# Altium PCB CW308T_ESP32_simple.PcbDoc
Units mil, origin at the board's own origin, x right, y up, seen from the top; angles counter-clockwise.
Board outline 2055 x 2540 mil, 2 copper layers (Component Side, Bottom Layer), stack 12.8 mil thick; 39 components, 35 nets, 219 pads, 256 vias.
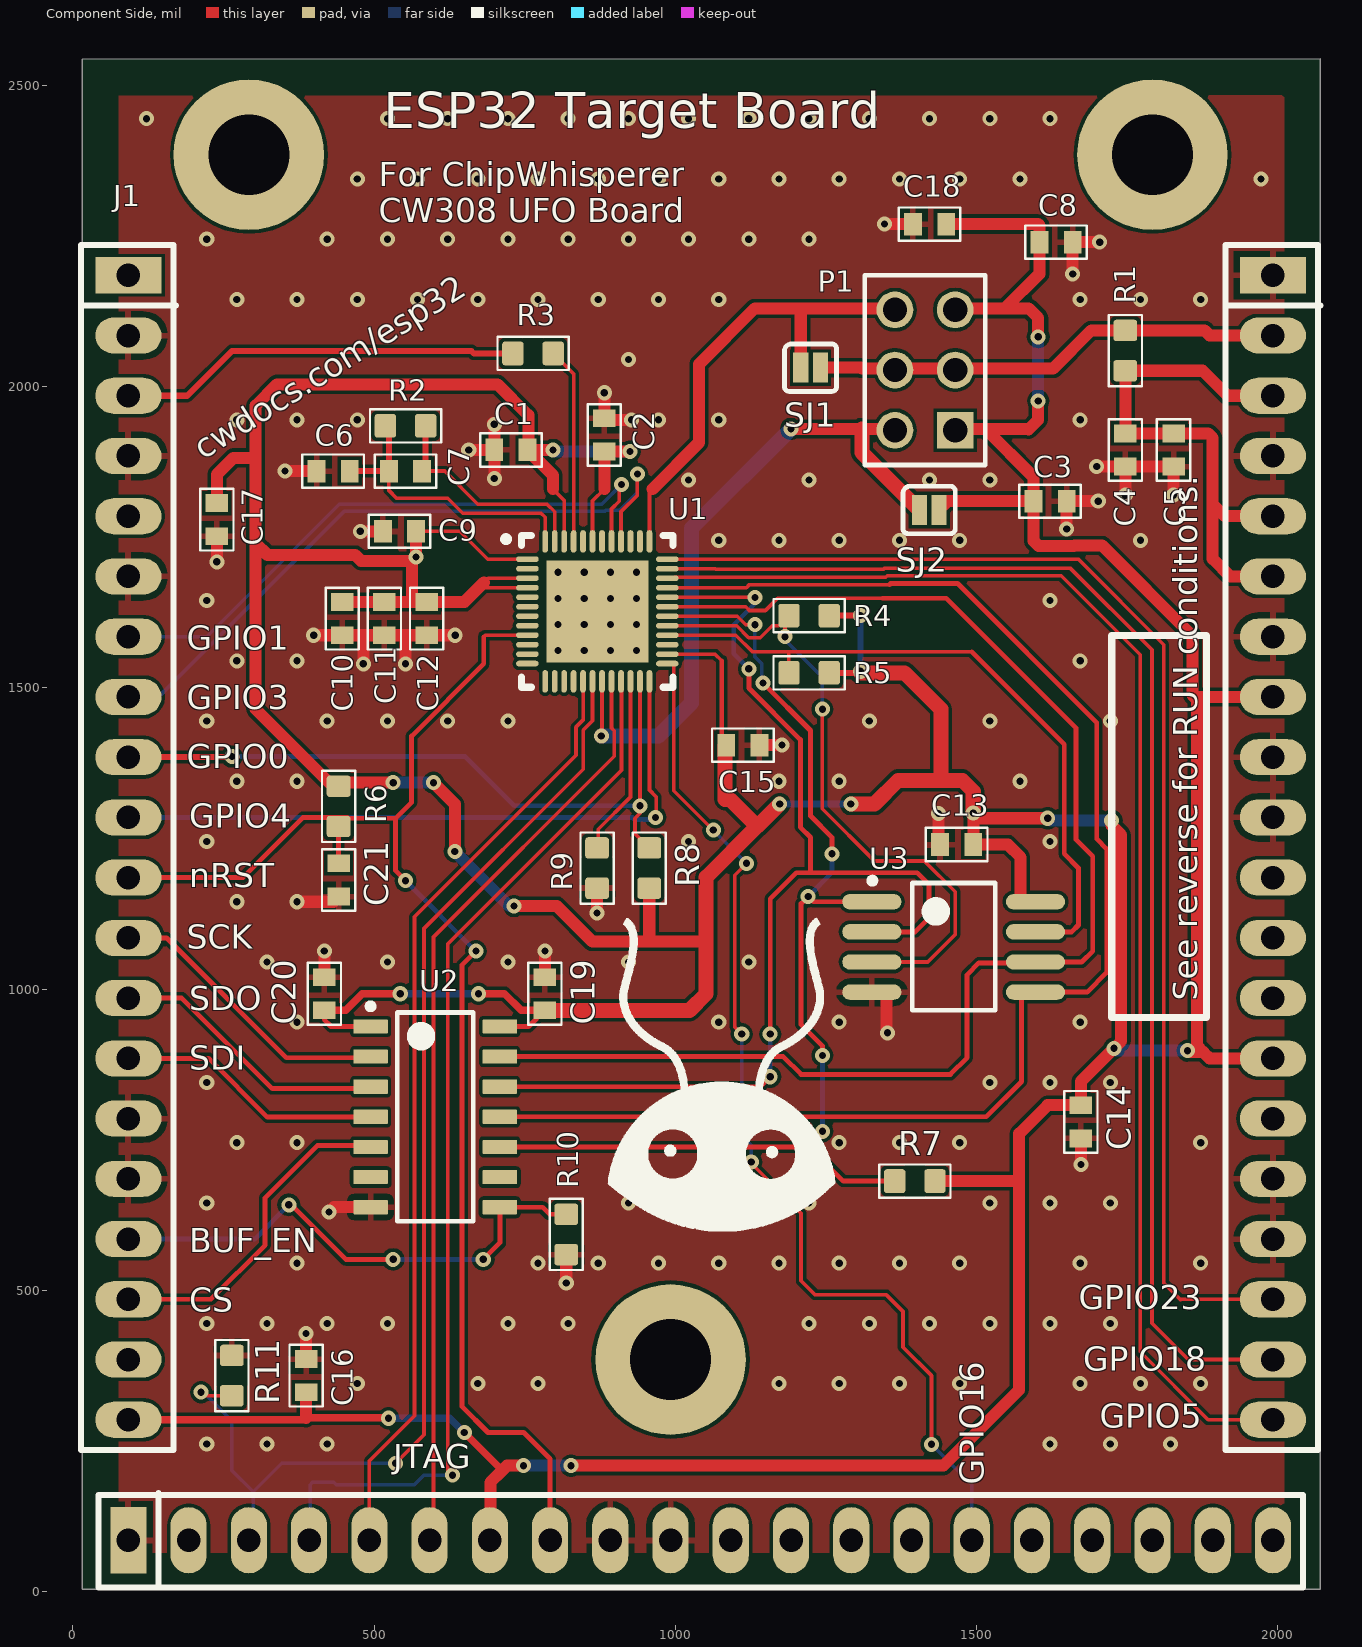
[diagram p0: Component Side view]
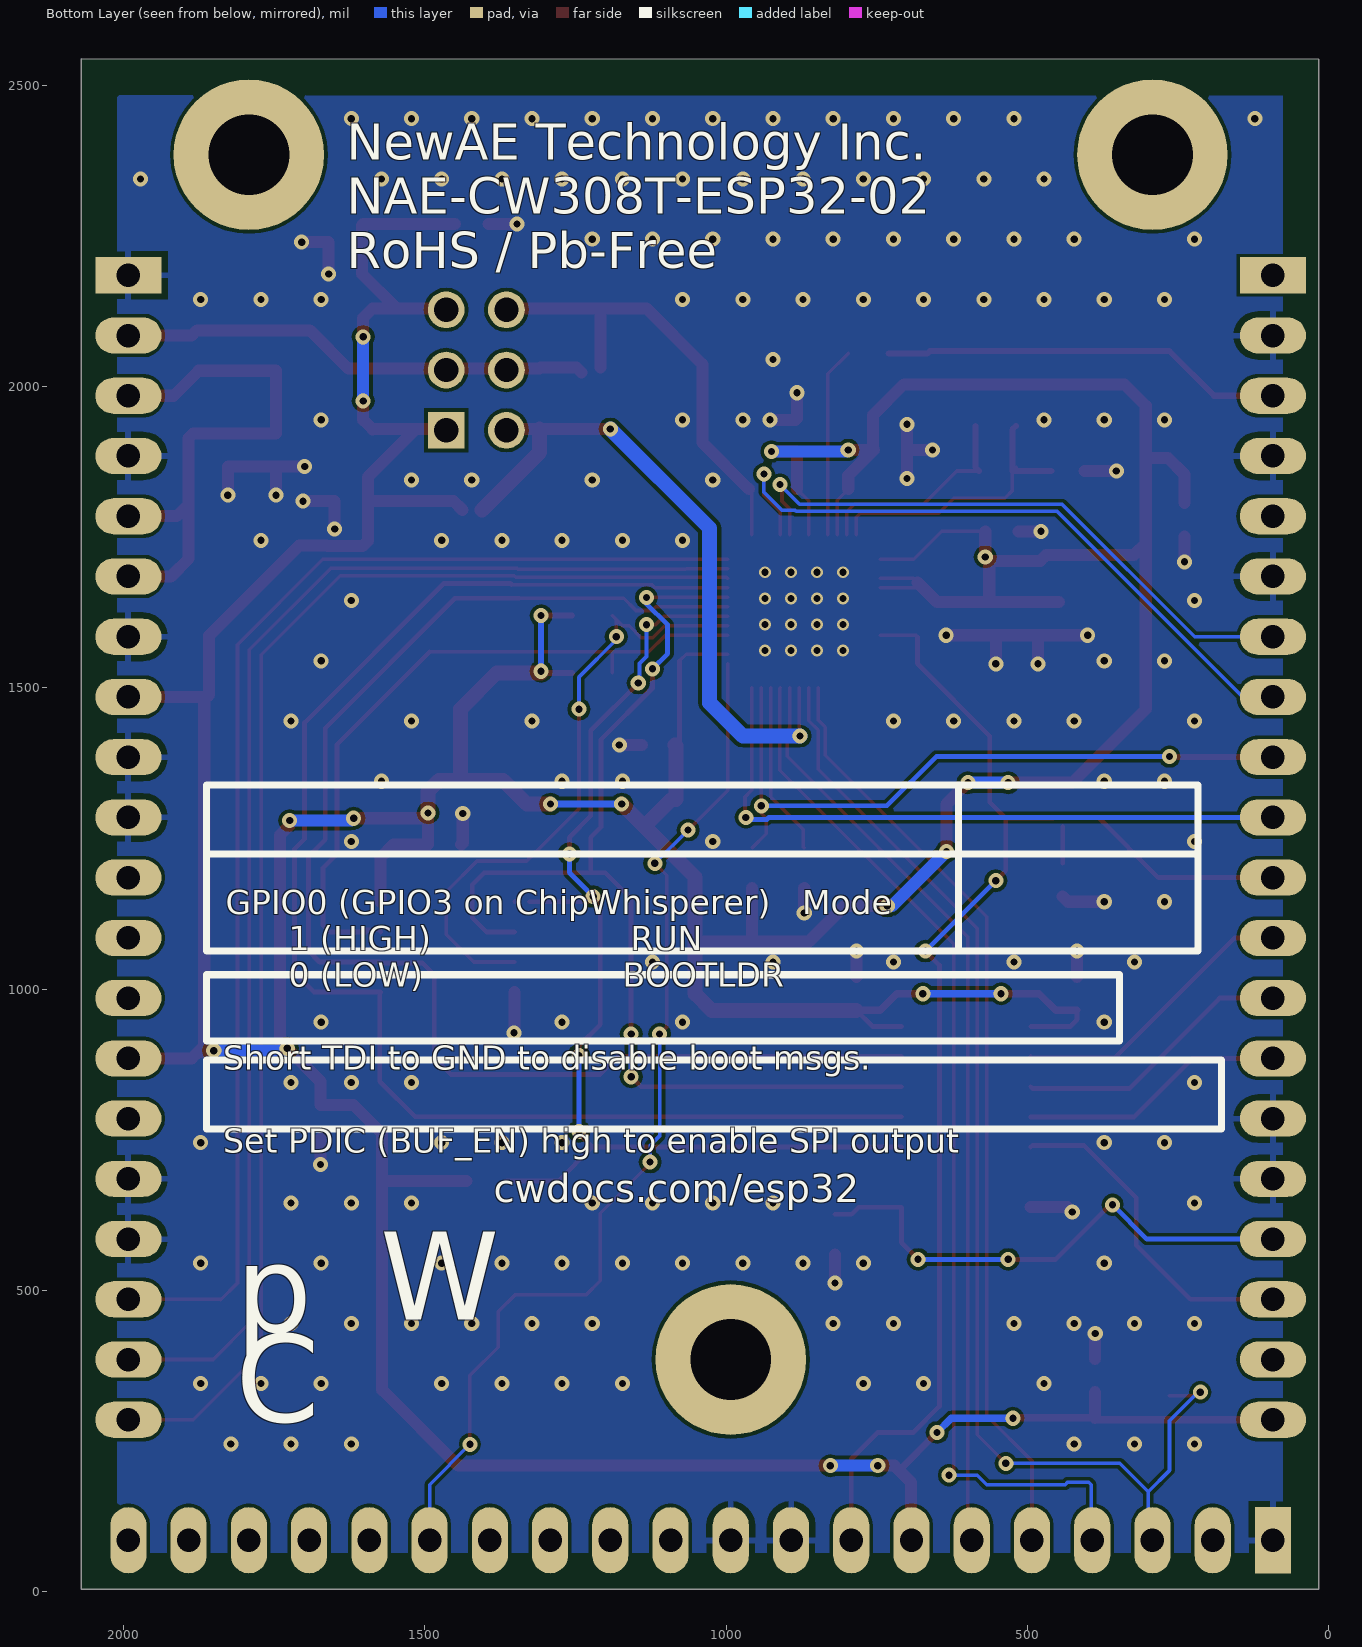
[diagram p1: Bottom Layer view, seen from below]

## Layer stack, top to bottom
Top Solder: solder mask 0.4, Solder Resist, Dk 3.5
Component Side: signal copper 1.4
Dielectric 1: core 10, FR-4, Dk 4.2
Bottom Layer: signal copper 1.4
Solder Side: solder mask 0.4, Solder Resist, Dk 3.5

## Board outline
15.75,3.94 15.75,2543.31 2070.75,2543.94 2070.75,3.94

## Design rules (kind name [scope] priority, off if disabled: settings)
BoardOutlineClearance BoardOutlinePoly [IsPolygon] p1: gap=60 ignorepadtopadclearanceinfootprint=FALSE
BoardOutlineClearance [All] p2: gap=30 ignorepadtopadclearanceinfootprint=FALSE except(0: Arc-SplitContinuation Track-SplitContinuation SMDPad-SplitContinuation THPad-SplitContinuation Via-SplitContinuation Fill-SplitContinuation Poly-SplitContinuation Region-SplitContinuation Text-SplitContinuation)
Clearance [All] p1: gap=6 ignorepadtopadclearanceinfootprint=FALSE except(0: Arc-Hole Track-Hole SMDPad-Hole THPad-Hole Via-Hole Fill-Hole Poly-Hole Region-Hole Text-Hole)
HoleSize [All] p1: absolutevalues=TRUE maxlimit=200 minlimit=1 maxpercent=80.000 minpercent=20.000
MinimumSolderMaskSliver [All] p1: minsoldermaskwidth=5
PlaneConnect PlaneConnect_viaDirect [IsVia] p1: planeconnectstyle=Direct reliefexpansion=20 reliefentries=4 reliefconductorwidth=10 reliefairgap=10
PlaneConnect [All] p2: planeconnectstyle=Relief reliefexpansion=20 reliefentries=4 reliefconductorwidth=10 reliefairgap=10
PolygonConnect PolygonConnect_viaDirect [All vs isVia] p1: connectstyle=Direct reliefconductorwidth=10 reliefentries=4 polygonreliefangle="90 Angle" airgapwidth=10
PolygonConnect [All] p2: connectstyle=Relief reliefconductorwidth=10 reliefentries=4 polygonreliefangle="90 Angle" airgapwidth=10
RoutingVias [All] p1: holewidth=28 width=150 viastyle="Through Hole" minholewidth=12 minwidth=24 maxholewidth=50 maxwidth=50
SilkToSilkClearance [All] p1: silktosilkclearance=5
SilkToSolderMaskClearance [IsPad] p1: minsilkscreentomaskgap=5 clearancetoexposedcopper=TRUE
SolderMaskExpansion [All] p1: expansion=4
Width [All] p1: maxlimit=100 minlimit=6 preferedwidth=8 minimp=50.000000 maximp=50.000000 favimp=50.000000
25 further rules are at their usual default settings.

## Classes and differential pairs
component class ESP32_cw: J1

## Components (designator, comment, footprint, x,y, rotation, side; value= is the part's Value field where it differs from the comment)
C1 "100n" CAPC0603_M 727.05,1894.88 r180 top
C2 "100n" CAPC0603_M 882.05,1919.88 r90 top
C3 "100n" CAPC0603_M 1622.05,1809.88 r180 top
C4 "100n" CAPC0603_M 1747.05,1894.88 r270 top
C5 "2u2" CAPC0603_M 1827.05,1894.88 r270 top
C6 "10n" CAPC0603_M 432.05,1859.88 r0 top
C7 "3n0" CAPC0603_M 552.05,1859.88 r0 top
C8 "100n" CAPC0603_M 1632.05,2239.88 r0 top
C9 "100n" CAPC0603_M 542.05,1759.88 r180 top
C10 "2u2" CAPC0603_M 447.05,1614.88 r270 top
C11 "2u2" CAPC0603_M 517.05,1614.88 r270 top
C12 "100n" CAPC0603_M 587.05,1614.88 r270 top
C13 "100n" CAPC0603_M 1467.05,1239.88 r180 top
C14 "100n" CAPC0603_M 1673.23,779.53 r270 top
C15 "100n" CAPC0603_M 1112.05,1404.88 r0 top
C16 "100n" CAPC0603_M 387.05,358.15 r90 top
C17 "100n" CAPC0603_M 238.82,1779.13 r270 top
C18 "100n" CAPC0603_M 1422.05,2269.88 r180 top
C19 "100n" CAPC0603_M 783.46,992.13 r270 top
C20 "100n" CAPC0603_M 417.32,992.13 r90 top
C21 "100n" CAPC0603_M 440.94,1181.1 r270 top
J1 "CW308_TARGETCON" CW308_TBOARD_CONN 92.05,2184.88 r0 top locked
P1 "TSW-103-08-G-D" SMTC-TSW-103-08-X-D 1464.57,1927.56 r90 top
R1 "10R" RESC1608X55N 1747.05,2059.88 r270 top
R2 "20k" RESC1608X55N 552.05,1934.88 r0 top
R3 "51R" RESC1608X55N 763.78,2055.12 r0 top
R4 "10k" RESC1608X55N 1222.05,1619.88 r180 top
R5 "10k" RESC1608X55N 1222.05,1524.88 r180 top
R6 "10k" RESC1608X55N 440.94,1303.15 r270 top
R7 "10k" RESC1608X55N 1397.64,681.1 r180 top
R8 "10k" RESC1608X55N 956.69,1200.79 r90 top
R9 "10k" RESC1608X55N 870.08,1200.79 r270 top
R10 "100k" RESC1608X55N 818.9,592.52 r90 top
R11 "10k" RESC1608X55N 263.78,358.27 r90 top
SJ1 "NC" SJ_2S_NC 1224.41,2031.5 r0 top
SJ2 "NC" SJ_2S_NC 1421.26,1795.28 r0 top
U1 "ESP32" QFN48_6x6_0.4mm 870.43,1626.85 r0 top
U2 "TXB0104" "SOIC14 (R-PDSO-G14)" 601.38,787.8 r0 top
U3 "IS25WP032D-JBLE" SOIC8_WIDE_NARROW 1462.05,1069.88 r0 top

## Footprints (in the part's own frame and the unit in brackets; to place one, negate y for a bottom-side part, rotate by r counter-clockwise, add the part's x,y. Pads: shape width x height; smd on the part's side, far side on the other; paste and mask are expansions set on the pad)
CAPC0603_M [mm]
  rect 0.75x0.95 smd: 1(-0.7,0) 2(0.7,0)
  silkscreen extent -1.3,-0.7 1.3,0.7, body extent -0.85,-0.45 0.85,0.45, height 0.9
CW308_TBOARD_CONN [mil]
  rect 110x60 hole 39: A1(0,0) C1(1900,0)
  oval 110x60 hole 39: A2(0,-100) A3(0,-200) A4(0,-300) A5(0,-400) A6(0,-500) A7(0,-600) A8(0,-700) A9(0,-800) A10(0,-900) A11(0,-1000) A12(0,-1100) A13(0,-1200) A14(0,-1300) A15(0,-1400) A16(0,-1500) A17(0,-1600) A18(0,-1700) A19(0,-1800) A20(0,-1900) C2(1900,-100) C3(1900,-200) C4(1900,-300) C5(1900,-400) C6(1900,-500) C7(1900,-600) C8(1900,-700) C9(1900,-800) C10(1900,-900) C11(1900,-1000) C12(1900,-1100) C13(1900,-1200) C14(1900,-1300) C15(1900,-1400) C16(1900,-1500) C17(1900,-1600) C18(1900,-1700) C19(1900,-1800) C20(1900,-1900)
  rect 60x110 hole 39: B1(0,-2100)
  oval 60x110 hole 39: B2(100,-2100) B3(200,-2100) B4(300,-2100) B5(400,-2100) B6(500,-2100) B7(600,-2100) B8(700,-2100) B9(800,-2100) B10(900,-2100) B11(1000,-2100) B12(1100,-2100) B13(1200,-2100) B14(1300,-2100) B15(1400,-2100) B16(1500,-2100) B17(1600,-2100) B18(1700,-2100) B19(1800,-2100) B20(1900,-2100)
  round 250 hole 134: MH1(200,200) MH2(900,-1800) MH2(1700,200)
  silkscreen extent -79,-2179 1979,50, body extent -50,-2149 1950,50, height 48
QFN48_6x6_0.4mm [mm] "QFN, 48-Leads, Body 6.00x6.00mm, Pitch 0.40mm, Thermal Pad 4.30x4.30mm, IPC Low Density"
  oval 0.95x0.24 smd paste-0.04: 1(-2.95,2.2) 2(-2.95,1.8) 3(-2.95,1.4) 4(-2.95,1) 5(-2.95,0.6) 6(-2.95,0.2) 7(-2.95,-0.2) 8(-2.95,-0.6) 9(-2.95,-1) 10(-2.95,-1.4) 11(-2.95,-1.8) 12(-2.95,-2.2) 25(2.95,-2.2) 26(2.95,-1.8) 27(2.95,-1.4) 28(2.95,-1) 29(2.95,-0.6) 30(2.95,-0.2) 31(2.95,0.2) 32(2.95,0.6) 33(2.95,1) 34(2.95,1.4) 35(2.95,1.8) 36(2.95,2.2)
  oval 0.24x0.95 smd paste-0.04: 13(-2.2,-2.95) 14(-1.8,-2.95) 15(-1.4,-2.95) 16(-1,-2.95) 17(-0.6,-2.95) 18(-0.2,-2.95) 19(0.2,-2.95) 20(0.6,-2.95) 21(1,-2.95) 22(1.4,-2.95) 23(1.8,-2.95) 24(2.2,-2.95) 37(2.2,2.95) 38(1.8,2.95) 39(1.4,2.95) 40(1,2.95) 41(0.6,2.95) 42(0.2,2.95) 43(-0.2,2.95) 44(-0.6,2.95) 45(-1,2.95) 46(-1.4,2.95) 47(-1.8,2.95) 48(-2.2,2.95)
  rect 4.3x4.3 smd paste-10: 49(0,0)
  silkscreen extent -3.97,-3.2 3.2,3.2, body extent -3.02,-3.02 3.02,3.02, height 0.9
RESC1608X55N [mm] "Chip Resistor, Body 1.6x0.8mm, EIA 0603, IPC Medium Density"
  round 0.254 on Mech15: 0(0,0)
  rrect25% 0.9x1 smd: 1(-0.85,0) 2(0.85,0)
  Component Side pour cut-out: -0.6,0.5 -0.4,0.7 0.4,0.7 0.6,0.5 0.6,-0.5 0.4,-0.7 -0.4,-0.7 -0.6,-0.5
  silkscreen extent -1.5,-0.7 1.5,0.7, body extent -0.87,-0.47 0.88,0.48, height 0.54
SJ_2S_NC [mil] "Solder Jumper, closed with solder paste"
  rect 25x50 smd: 1(-16.22,0) 2(16.22,0)
  silkscreen extent -43,-39 43,39
SMTC-TSW-103-08-X-D [mm] ".025 SQ Post Terminal Strip Assembly, 2x3 Pins, Vertical, 2.54mm Pitch, Male"
  rect 1.55x1.55 hole 1.02: 1(0,0)
  round 1.55 hole 1.02: 2(0,2.54) 3(2.54,0) 4(2.54,2.54) 5(5.08,0) 6(5.08,2.54)
  silkscreen extent -1.46,-1.27 6.54,3.81, body extent -1.27,-1.27 6.35,3.81, height 8.38
SOIC8_WIDE_NARROW [mm] "SOIC, 8-Leads, Body 5.28x5.28mm, Pitch 1.27mm, NOT IPC - Fits Narrow+Wide"
  oval 2.5x0.65 smd: 1(-3.45,1.905) 2(-3.45,0.635) 3(-3.45,-0.635) 4(-3.45,-1.905) 5(3.45,-1.905) 6(3.45,-0.635) 7(3.45,0.635) 8(3.45,1.905)
  silkscreen extent -3.55,-2.67 1.75,2.92, body extent -3.95,-2.7 3.95,2.7, height 2.16
"SOIC14 (R-PDSO-G14)" [mm] "SOIC, 14-Leads, Body 8.65x3.90mm, Pitch 1.27mm, IPC Medium Density"
  rrect10% 1.45x0.6 smd: 1(-2.725,3.81) 2(-2.725,2.54) 3(-2.725,1.27) 4(-2.725,0) 5(-2.725,-1.27) 6(-2.725,-2.54) 7(-2.725,-3.81) 8(2.725,-3.81) 9(2.725,-2.54) 10(2.725,-1.27) 11(2.725,0) 12(2.725,1.27) 13(2.725,2.54) 14(2.725,3.81)
  silkscreen extent -2.85,-4.4 1.6,4.78, body extent -3,-4.4 3,4.4, height 1.75

## Part data
C1 C2 C3 C4 C8 C9 C12 C13 C14 C15 C16 C17 C18 C19 C20 C21: library part CCHIP-100n-0603, "100n, 0603", Case-EIA=0603, Case-Metric=1608, Manufacture 1=Kemet, Manufacture Part Number 1=C0603C104K5RACTU, Rated Voltage=50V, Supplier Part Number 1=399-5089-2-ND, Component Group=Capacitor, Component Type=Standard, Mounting Technology=SMT, Part Number=CCHIP-100n-0603, Pin Count=2, Supplier 1=Digi-Key
C5 C10 C11: library part CCHIP-2u2-0603, "2u2, 0603", Case-EIA=0603, Case-Metric=1608, Manufacture 1=Samsung, Manufacture Part Number 1=CL10B225KP8NNNC, Supplier Part Number 1=1276-1134-2-ND, Component Group=Capacitor, Component Type=Standard, Mounting Technology=SMT, Part Number=CCHIP-2u2-0603, Pin Count=2, Supplier 1=Digi-Key
C6: library part CCHIP-10n-0603, "10n, 0603", Case-EIA=0603, Case-Metric=1608, Component Group=Capacitor, Component Type=Standard, Mounting Technology=SMT, Part Number=CCHIP-10n-0603, Pin Count=2
C7: library part CCHIP-3n0-0603, "3n0, 0603", Case-EIA=0603, Case-Metric=1608, Component Group=Capacitor, Component Type=Standard, Mounting Technology=SMT, Part Number=CCHIP-3n0-0603, Pin Count=2
J1: library part CW308_TBOARD, "CW308 \"Standard\" Target Board Connector", Component Group=Mechanical, Component Type=Standard, Mounting Technology=Through-hole, Part Number=CW308_TBOARD, Pin Count=60, Pitch=2.54mm
P1: library part CMP-1024-00338-1, Manufacturer=Samtec, Temperature Range="-55 to 125 degC", ComponentLink1Description="Manufacturer URL", ComponentLink1URL=http://www.samtec.com, ComponentLink2Description=Datasheet, ComponentLink2URL=http://www.samtec.com/documents/webfiles/pdf/TSW_TH.PDF, ComponentLink3Description="Package Specification", ComponentLink3URL=http://www.samtec.com/documents/webfiles/cpdf/TSW-XXX-XX-XXX-X-XX-XXX-MKT.pdf, DatasheetVersion=F-214, Mounting Technology=Through-hole, Orientation=Vertical, PackageDescription=".025[0.64] SQ. Post Terminal Strip Assembly", PackageReference=TSW-103-08-X-D, PackageVersion="DM, 8/1988", PartNumber=TSW-103-08-G-D, Pitch="2.54 mm", RoHS=True
R1: library part RCHIP-10R-0603, "10R res, 0603, 1%, 1/10W", Case-EIA=0603, Case-Metric=1608, Manufacture 1=Yageo, Manufacture Part Number 1=RC0603FR-0710RL, Rated Power=0.1W, Rated Voltage=75VDC, Supplier Part Number 1=311-10.0HRCT-ND, Temperature Range="-55C to 155C", Tolerance=1%, Component Group=Resistor, Component Type=Standard, Mounting Technology=SMT, Part Number=RCHIP-10R-0603, Pin Count=2, Supplier 1=Digi-Key
R2: library part RCHIP-20K-0603, "20k res, 0603, 1%, 1/10W", Case-EIA=0603, Case-Metric=1608, Manufacture 1=Yageo, Manufacture Part Number 1=RC0603FR-0720KL, Rated Power=0.1W, Rated Voltage=75VDC, Supplier Part Number 1=311-20.0KHRCT-ND, Temperature Range="-55C to 155C", Tolerance=1%, Component Group=Resistor, Component Type=Standard, Mounting Technology=SMT, Part Number=RCHIP-20K-0603, Pin Count=2, Supplier 1=Digi-Key
R3: library part RCHIP-51R-0603, "51R res, 0603, 1%, 1/10W", Case-EIA=0603, Case-Metric=1608, Manufacture 1=Yageo, Manufacture Part Number 1=RC0603FR-0751RL, Rated Power=0.1W, Rated Voltage=75VDC, Supplier Part Number 1=311-51.0HRCT-ND, Temperature Range="-55C to 155C", Tolerance=1%, Component Group=Resistor, Component Type=Standard, Mounting Technology=SMT, Part Number=RCHIP-51R-0603, Pin Count=2, Supplier 1=Digi-Key
R4 R5 R6 R7 R8 R9 R11: library part RCHIP-10K-0603, "10k res, 0603, 1%, 1/10W", Case-EIA=0603, Case-Metric=1608, Manufacture 1=Yageo, Manufacture Part Number 1=RC0603FR-0710KL, Rated Power=0.1W, Rated Voltage=75VDC, Supplier Part Number 1=311-10.0KHRCT-ND, Temperature Range="-55C to 155C", Tolerance=1%, Component Group=Resistor, Component Type=Standard, Mounting Technology=SMT, Part Number=RCHIP-10K-0603, Pin Count=2, Supplier 1=Digi-Key
R10: library part RCHIP-100K-0603, "100k res, 0603, 1%, 1/10W", Case-EIA=0603, Case-Metric=1608, Manufacture 1=Yageo, Manufacture Part Number 1=RC0603FR-07100KL, Rated Power=0.1W, Rated Voltage=75VDC, Supplier Part Number 1=311-100KHRCT-ND, Temperature Range="-55C to 155C", Tolerance=1%, Component Group=Resistor, Component Type=Standard, Mounting Technology=SMT, Part Number=RCHIP-100K-0603, Pin Count=2, Supplier 1=Digi-Key
SJ1 SJ2: library part SJ_2S, "Solder Jumper, NC", Component Group="PCB Feature", Component Type="Standard (No BOM)", Mounting Technology=COPPER, Part Number=SJ_2S, Pin Count=2
U1: "Dual-Core WiFi/Bluetooth Chip", Component Group="Digital IC", Component Type=Standard, Mounting Technology=SMT, Part Number=ESP32, Pin Count=48
U2: library part TXB0104DR, "IC 4BIT NON-INV TRANSLTR 14-SOIC", Manufacture 1="Texas Instruments", Supplier Part Number 1=296-21928-1-ND, Component Group="Digital IC", Component Type=Standard, Manufacture Part Number 1=TXB0104DR, Mounting Technology=SMT, Part Number=TXB0104DR, Pin Count=14, PP Material Stack=0, PP Rotation=0, RoHS=Yes, Supplier 1=Digi-Key
U3: "32MB QPI/QPI/QSPI 8-PIN SOP 208M", Manufacture 1=ISSI, Supplier Part Number 1=706-1615-ND, Component Group="Digital IC", Component Type=Standard, Manufacture Part Number 1=IS25WP032D-JBLE, Mounting Technology=SMT, Part Number=IS25WP032D-JBLE, Pin Count=8, Pitch=1.27mm, RoHS=Yes, Supplier 1=Digi-Key

## Via types
v1: diameter 25, hole 12, Component Side to Bottom Layer, tented both sides, 240 vias
v2: diameter 19.68, hole 11.81, Component Side to Bottom Layer, 16 vias

## Nets (pads, with @x,y where several pads share a name; then routed paths per layer and width w, separated by ;. In a path a pad name is that pad's centre, name@x,y a point inside that pad or via, vN(x,y) a via of type N, cw(c..) or ccw(c..) an arc to the next point about the centre after c; other vN are vias at no path point)
BUF_CS: J1.A18 U2.5 | length 554.9
  Component Side w8: J1.A18 228.98,484.88 318.9,574.8 318.9,653.54 405.51,740.16 491.73,740.16 U2.5
BUF_SCK: J1.A12 U2.2 | length 485.3
  Component Side w8: J1.A12 155.28,1084.88 354.33,885.83 492.13,885.83 U2.2
BUF_SDI: J1.A14 U2.4 | length 442.6
  Component Side w8: J1.A14 225.35,884.88 322.83,787.4 493.7,787.4 U2.4
BUF_SDO: J1.A13 U2.3 | length 465.6
  Component Side w8: J1.A13 180.47,984.88 330.71,834.65 490.94,834.65 U2.3
CLK: J1.A3 R3.1 | length 670.6
  Component Side w10: J1.A3 189.61,1984.88 263.78,2059.06 661.42,2059.06 665.35,2055.12 R3.1
FLASH_CS: R7.2 U1.30 U2.10 U3.1 | length 1895
  Component Side w6: U1.30@997.4,1618.98 1102.95,1618.98 1117.05,1604.88 v1(1132.05,1604.88)
  Component Side w8: U2.10 1222.05,737.8 ; v1(1145.67,1507.87) 1224.41,1429.13 1224.41,1287.4 1259.84,1251.97 v1(1259.84,1224.41) ; v1(1244.09,763.78) 1244.09,759.84 1222.05,737.8 ; v1(1244.09,889.76) 1244.09,905.51 1208.66,940.94 1208.66,1141.73 v1(1220.47,1153.54) 1229.13,1144.88 U3.1 ; U3.1@1350.04,1145.67 U3.1@1350.83,1144.88 ; R7.2 1278.74,681.1 1222.05,737.8
  Bottom Layer w6: v1(1132.05,1604.88) 1132.05,1551.9 1143.55,1540.4 1143.55,1510 v1(1145.67,1507.87)
  Bottom Layer w8: v1(1220.47,1153.54) 1259.84,1192.91 v1(1259.84,1224.41) ; v1(1244.09,763.78) v1(1244.09,889.76)
FLASH_HD: R5.2 U1.28 U3.7 | length 1170.3
  Component Side w6: U1.28@997.4,1587.48 1100.51,1587.48 1128.11,1559.88 1188.58,1559.88 ; R5.2 1188.58,1559.88 ; 1492.05,1559.88 1188.58,1559.88
  Component Side w8: 1492.05,1559.88 1645.67,1406.26 1645.67,1224.41 1669.29,1200.79 1669.29,1106.3 1657.87,1094.88 U3.7 ; U3.7@1573.27,1094.88 1576.81,1098.43 U3.7@1597.87,1098.43
FLASH_SCK: U1.31 U2.13 U3.6 | length 2311.7
  Component Side w6: U1.31@997.4,1634.72 1116.8,1634.72 1123.14,1628.38 1149.55,1628.38 1169.73,1648.57 1343.36,1648.57
  Component Side w8: U2.13 1179.13,887.8 1208.66,858.27 1456.69,858.27 1484.25,885.83 1484.25,1023.62 1503.94,1043.31 1571.69,1043.31 1573.27,1044.88 1674.8,1044.88 1692.91,1062.99 1692.91,1220.47 1665.35,1248.03 1665.35,1433.07 1449.86,1648.57 1343.36,1648.57
FLASH_SDI: U1.33 U2.11 U3.5 | length 2418.7
  Component Side w6: U1.33@997.4,1666.22 1117.98,1666.22 1123.14,1671.38 1355.55,1671.38
  Component Side w8: U2.11 1516.14,787.8 1574.8,846.46 1574.8,993.35 1573.27,994.88 1683.86,994.88 1716.54,1027.56 1716.54,1232.28 1699.55,1249.27 1699.55,1442.19 1468.5,1673.23 1357.39,1673.23 1355.55,1671.38
FLASH_SDO: U1.32 U2.12 U3.2 | length 1835.1
  Component Side w6: U1.32@997.4,1650.47 1131.46,1650.47 v1(1132.05,1649.88)
  Component Side w8: U2.12 1140.94,837.8 v1(1157.48,854.33) ; v1(1122.05,1531.5) 1122.05,1499.68 1207.59,1414.13 1207.59,1268.78 1224.41,1251.97 1224.41,1192.91 ; v1(1157.48,925.2) 1157.48,1149.61 1200.79,1192.91 1224.41,1192.91 ; U3.2@1350.83,1094.88 1398.03,1094.88 1421.26,1118.11 1421.26,1173.23 1401.57,1192.91 1224.41,1192.91
  Bottom Layer w8: v1(1122.05,1531.5) 1097.05,1556.5 1097.05,1604.88 1132.05,1639.88 v1(1132.05,1649.88) ; v1(1157.48,854.33) v1(1157.48,925.2)
FLASH_WP: R4.2 U1.29 U3.3 | length 1035.4
  Component Side w6: U1.29@997.4,1603.23 1101.73,1603.23 1121.58,1583.38 1140.95,1583.38 1160.8,1603.23 1171.93,1603.23 R4.2@1182.05,1613.35 ; v1(1182.05,1584.88) R4.2@1182.05,1613.35 ; R4.2 R4.2@1182.05,1613.35 ; v1(1244.09,1464.57) 1244.09,1299.21 1330.71,1212.6 1413.39,1212.6 1464.57,1161.42 1464.57,1090.55 1418.9,1044.88 U3.3@1350.83,1044.88
  Bottom Layer w6: v1(1182.05,1584.88) 1182.05,1579.88 1244.09,1517.83 v1(1244.09,1464.57)
GND: C1.2 C2.2 C3.1 C4.2 C5.2 C6.1 C8.2 C9.2 C10.2 C11.2 C12.2 C13.2 C14.2 C15.2 C16.2 C17.2 C18.2 C19.1 C20.2 C21.2 J1.A2 J1.A4 J1.A6 J1.A15 J1.A16 J1.B1 J1.B9 J1.B10 J1.C1 J1.C4 J1.C7 J1.C9 J1.C10 J1.C16 J1.C17 R9.2 R10.1 R11.2 U1.49 U2.7 U3.4 | length 1718.5
  Component Side w20: v1(238.82,1709.13) C17.2 ; v1(352.05,1859.88) C6.1 ; v1(372.05,1144.88) 432.28,1144.88 C21.2 ; C16.2 v1(387.05,428.15) ; v1(399.61,1587.32) C10.2 482.05,1587.32 ; C20.2 v1(417.32,1062.99) ; v1(425.2,629.92) 433.07,637.8 U2.7 ; v1(477.05,1759.88) C9.2 ; v1(482.05,1539.88) 482.05,1587.32 ; v1(552.05,1539.88) 552.05,1587.32 ; v1(634.49,1587.32) C12.2 552.05,1587.32 ; v1(657.05,1894.88) C1.2 ; v1@697.05,1939.88 v1(699.49,1937.44) C1.2 ; v1(699.49,1847.44) C1.2 ; C19.1 v1(783.46,1062.99) ; v1(818.9,511.81) R10.1 ; v1(870.08,1125.98) R9.2 ; v1(882.05,1989.88) C2.2 884.61,1944.88 v1(927.05,1944.88) ; C15.2 v1(1177.05,1404.88) ; v1(1347.05,2269.88) C18.2 ; U3.4@1350.83,994.88 1350.83,926.1 v1(1352.05,927.32) ; v1(1437.01,1291.34) 1437.01,1242.36 C13.2 ; v1(1649.61,1763.78) C3.1 v1(1702.05,1809.88) ; v1(1659.61,2187.17) C8.2 v1(1704.45,2239.88) ; v1(1673.23,708.66) C14.2 ; v1(1699.49,1867.32) C4.2 ; v1(1747.05,1819.88) C4.2 ; v1(1827.05,1819.88) C5.2 C4.2 ; 482.05,1587.32 C11.2 552.05,1587.32
  other v1: 222.05,244.88 322.05,244.88 422.05,244.88 1622.05,244.88 1722.05,244.88 1822.05,244.88 472.05,344.88 672.05,344.88 772.05,344.88 1172.05,344.88 1272.05,344.88 1372.05,344.88 1472.05,344.88 1672.05,344.88 1772.05,344.88 1872.05,344.88 222.05,444.88 322.05,444.88 422.05,444.88 522.05,444.88 722.05,444.88 822.05,444.88 1222.05,444.88 1322.05,444.88 1422.05,444.88 1522.05,444.88 1622.05,444.88 1722.05,444.88 372.05,544.88 772.05,544.88 872.05,544.88 972.05,544.88 1072.05,544.88 1172.05,544.88 1272.05,544.88 1372.05,544.88 1472.05,544.88 1672.05,544.88 1872.05,544.88 222.05,644.88 922.05,644.88 1022.05,644.88 1122.05,644.88 1222.05,644.88 1522.05,644.88 1622.05,644.88 1722.05,644.88 272.05,744.88 372.05,744.88 1272.05,744.88 1372.05,744.88 1472.05,744.88 1872.05,744.88 222.05,844.88 1522.05,844.88 1622.05,844.88 1722.05,844.88 372.05,944.88 1072.05,944.88 1272.05,944.88 1672.05,944.88 322.05,1044.88 522.05,1044.88 722.05,1044.88 922.05,1044.88 1122.05,1044.88 272.05,1144.88 222.05,1244.88 1022.05,1244.88 1622.05,1244.88 272.05,1344.88 372.05,1344.88 1172.05,1344.88 1272.05,1344.88 1572.05,1344.88 222.05,1444.88 422.05,1444.88 522.05,1444.88 622.05,1444.88 722.05,1444.88 1322.05,1444.88 1522.05,1444.88 1722.05,1444.88 272.05,1544.88 372.05,1544.88 1672.05,1544.88 222.05,1644.88 1622.05,1644.88 1072.05,1744.88 1172.05,1744.88 1272.05,1744.88 1372.05,1744.88 1472.05,1744.88 1772.05,1744.88 1022.05,1844.88 1222.05,1844.88 1422.05,1844.88 1522.05,1844.88 272.05,1944.88 372.05,1944.88 472.05,1944.88 972.05,1944.88 1072.05,1944.88 1672.05,1944.88 922.05,2044.88 272.05,2144.88 372.05,2144.88 472.05,2144.88 572.05,2144.88 672.05,2144.88 772.05,2144.88 872.05,2144.88 972.05,2144.88 1072.05,2144.88 1672.05,2144.88 1772.05,2144.88 1872.05,2144.88 222.05,2244.88 422.05,2244.88 522.05,2244.88 622.05,2244.88 722.05,2244.88 822.05,2244.88 922.05,2244.88 1022.05,2244.88 1122.05,2244.88 1222.05,2244.88 472.05,2344.88 572.05,2344.88 672.05,2344.88 772.05,2344.88 872.05,2344.88 972.05,2344.88 1072.05,2344.88 1172.05,2344.88 1272.05,2344.88 1372.05,2344.88 1472.05,2344.88 1572.05,2344.88 1972.05,2344.88 122.05,2444.88 522.05,2444.88 622.05,2444.88 722.05,2444.88 822.05,2444.88 922.05,2444.88 1022.05,2444.88 1122.05,2444.88 1222.05,2444.88 1322.05,2444.88 1422.05,2444.88 1522.05,2444.88 1622.05,2444.88
  other v2: 805.47,1561.89 848.78,1561.89 892.09,1561.89 935.39,1561.89 805.47,1605.2 848.78,1605.2 892.09,1605.2 935.39,1605.2 805.47,1648.5 848.78,1648.5 892.09,1648.5 935.39,1648.5 805.47,1691.81 848.78,1691.81 892.09,1691.81 935.39,1691.81
GPIO3: J1.A9 R8.2 U1.23 | length 1170.2
  Component Side w6: U1.23@941.3,1499.88 v1(941.3,1304.13) 941.3,1291.69 933.07,1283.46 933.07,1257.87 R8.2
  Component Side w10: J1.A9 v1@272.05,1384.88
  Bottom Layer w8: v1(263.78,1385.83) 651.1,1385.83 732.8,1304.13 v1(941.3,1304.13)
GPIO16: J1.B15 U1.25 | length 1745.7
  Component Side w6: U1.25@997.4,1540.24 997.4,1329.37 v1(1062.99,1263.78) ; v1(1110.24,925.2) 1098.43,937.01 1098.43,1188.98 v1(1118.11,1208.66) ; v1(1125.98,712.6) 1125.98,710.54 1208.66,627.86 1208.66,515.75 1232.28,492.13 1350.39,492.13 1377.95,464.57 1377.95,405.51 1425.2,358.27 v1(1425.2,244.09)
  Bottom Layer w6: v1(1062.99,1263.78) v1(1118.11,1208.66) ; v1(1110.24,925.2) 1110.24,755.91 1125.98,740.16 v1(1125.98,712.6) ; v1(1425.2,244.09) 1492.05,177.24 J1.B15
LED1: J1.C18 U1.36 | length 2125
  Component Side w6: U1.36@997.4,1713.46 1669.29,1713.46 1811.02,1571.73 1811.02,511.81 1838.58,484.25 1839.21,484.88 J1.C18
LED2: J1.C19 U1.35 | length 2194.6
  Component Side w6: U1.35@997.4,1697.72 1066.06,1697.72 1066.93,1696.85 1345.66,1696.85 1347.04,1698.23 1656.1,1698.23 1791.34,1562.99 1791.34,444.88 1851.34,384.88 J1.C19
LED3: J1.C20 U1.34 | length 2254.9
  Component Side w6: U1.34@997.4,1681.97 998.81,1683.38 1349.16,1683.38 1352.01,1686.23 1640.54,1686.23 1771.65,1555.12 1771.65,397.64 1884.41,284.88 J1.C20
NetC6_2: C6.2 C7.1 R2.1 U1.48 | length 490.1
  Component Side w6: C7.1@518.58,1865.79 C7.1 524.49,1827.44 537.05,1814.88 622.05,1814.88 647.05,1789.88 777.05,1789.88 783.82,1783.11 U1.48@783.82,1753.82
  Component Side w10: C6.2 C7.1 524.49,1928.98 R2.1
NetC7_2: C7.2 R2.2 U1.47 | length 363.9
  Component Side w6: C7.2 617.05,1859.88 672.05,1804.88 787.05,1804.88 799.57,1792.36 U1.47@799.57,1753.82
  Component Side w10: C7.2 585.51,1865.79 R2.2
NetR3_2: R3.2 U1.45 | length 315.3
  Component Side w6: R3.2 831.06,2021.3 U1.45@831.06,1753.82
NetR9_1: R9.1 U1.22 | length 288.6
  Component Side w6: R9.1 872.05,1236.22 872.05,1265.29 925.55,1318.79 U1.22@925.55,1499.88
nRST: C21.1 J1.A11 J1.B8 R6.2 U1.9 | length 2330.1
  Component Side w6: 682.05,1584.88 684.65,1587.48 U1.9@743.46,1587.48
  Component Side w8: J1.A11 282.05,1184.88 382.05,1284.88 455.51,1284.88 457.05,1283.35 535.51,1283.35 ; C21.1 R6.2 ; v1(552.05,1179.88) 535.51,1196.42 535.51,1283.35 ; v1(668.94,1062.99) 645.67,1039.72 645.67,307.09 688.98,263.78 748.03,263.78 792.05,219.76 J1.B8 ; 682.05,1584.88 682.05,1539.88 562.05,1419.88 562.05,1309.88 535.51,1283.35
  Bottom Layer w8: v1(552.05,1179.88) v1(668.94,1062.99) v1@669.11,1062.81
OE: J1.A17 R10.2 U2.8 | length 863.3
  Component Side w8: v1(358.27,641.73) 362.2,641.73 452.76,551.18 v1(531.5,551.18) ; v1(681.1,551.18) 708.66,578.74 U2.8 779.53,637.8 791.34,625.98 R10.2
  Bottom Layer w8: J1.A17 301.42,584.88 v1(358.27,641.73) ; v1(531.5,551.18) v1(681.1,551.18)
RXD: J1.A8 U1.40 | length 1128.2
  Component Side w6: U1.40@909.8,1753.82 909.8,1792.64 937.05,1819.88 v1(937.05,1854.88)
  Bottom Layer w6: J1.A8 142.05,1484.88 450.05,1792.88 882.86,1792.88 884.86,1794.88 907.05,1794.88 937.05,1824.88 v1(937.05,1854.88)
SHUNTH: C4.1 C5.1 J1.C3 J1.C5 J1.C6 R1.2 | length 935.4
  Component Side w20: J1.C6 1921.42,1684.88 1892.05,1714.25 1892.05,1804.88 ; J1.C5 1912.05,1784.88 1892.05,1804.88 ; J1.C3 1917.05,1984.88 1875.51,2026.42 R1.2 C4.1 C5.1 1884.49,1922.44 1892.05,1914.88 1892.05,1804.88
SHUNTL: J1.C2 P1.3 P1.4 R1.1 SJ1.2 | length 785.6
  Component Side w20: SJ1.2@1240.16,2023.62 1248.03,2031.5 1307.99,2031.5 1309.61,2029.88 1464.57,2029.88 1627.05,2029.88 1690.51,2093.35 R1.1 1878.58,2093.35 1887.05,2084.88 J1.C2
TCK: J1.B6 U1.20 | length 1543.8
  Component Side w6: J1.B6 598.43,91.26 598.43,1086.26 898.55,1386.38 898.55,1428.79 894.06,1433.28 U1.20@894.06,1499.88
TDI: J1.B3 R11.1 U1.18 | length 2019.2
  Component Side w6: v1(212.6,330.71) 218.5,324.8 R11.1 ; v1(535.43,212.6) 582.68,259.84 582.68,1100.51 847.05,1364.88 847.05,1429.88 862.56,1445.39 U1.18@862.56,1499.88
  Bottom Layer w6: v1(212.6,330.71) 216.54,330.71 263.78,283.46 263.78,200.79 299.21,165.35 ; J1.B3 299.21,92.05 299.21,165.35 ; v1(535.43,212.6) 346.46,212.6 299.21,165.35
TDO: J1.B4 U1.21 | length 1769
  Component Side w6: v1(629.92,192.91) 622.05,200.79 622.05,1074.88 910.55,1363.38 910.55,1499.14 U1.21@909.8,1499.88
  Bottom Layer w6: J1.B4 393.7,86.54 393.7,177.17 397.64,181.1 433.07,181.1 437.01,177.17 566.93,177.17 582.68,192.91 v1(629.92,192.91)
TMS: J1.B5 U1.17 | length 1561.9
  Component Side w6: J1.B5 492.05,216.46 566.93,291.34 566.93,1119.76 835.05,1387.88 835.05,1434.85 846.81,1446.62 U1.17@846.81,1499.88
TRIG: J1.A10 U1.24 | length 1098
  Component Side w6: U1.24@957.05,1499.88 957.05,1330.35 968.5,1318.9 968.5,1286.34 v1(967.05,1284.88)
  Bottom Layer w8: J1.A10 928.73,1284.88 931.98,1281.63 963.8,1281.63 v1(967.05,1284.88)
TXD: J1.A7 U1.41 | length 1019.1
  Component Side w6: U1.41@894.06,1753.82 894.06,1796.89 907.05,1809.88 907.05,1839.88 909.39,1837.54 v1(910.55,1837.54)
  Bottom Layer w6: J1.A7 222.05,1584.88 442.05,1804.88 877.89,1804.88 v1(910.55,1837.54)
VCC: C1.1 C2.1 C3.2 C8.1 C9.1 C10.1 C11.1 C12.1 C13.1 C14.1 C15.1 C16.1 C17.1 C18.1 C19.2 C20.1 J1.A20 J1.B7 J1.C8 J1.C14 P1.1 P1.5 R4.1 R5.1 R6.1 R7.1 R8.1 SJ2.2 U1.1 U1.3 U1.4 U1.26 U1.43 U1.46 U2.1 U2.14 U3.8 | length 12142.8
  Component Side w6: C9.1 642.05,1759.88 688.46,1713.46 U1.1@743.46,1713.46 ; U1.4@743.46,1666.22 685.71,1666.22 682.05,1669.88 682.05,1674.88 689.13,1681.97 U1.3@743.46,1681.97 ; 797.05,1829.88 815.31,1811.61 U1.46@815.31,1753.82 ; U1.43@862.56,1753.82 862.56,1810.39 882.05,1829.88 ; U1.26@997.4,1555.98 1065.94,1555.98 1077.05,1544.88
  Component Side w8: C20.1 417.32,948.82 428.35,937.8 U2.1 ; U2.14 756.69,937.8 C19.2 ; 1077.05,1544.88 1077.05,1412.32 C15.1
  Component Side w10: R5.1 v1@1307.05,1524.88 ; R4.1 v1(1307.05,1619.88)
  Component Side w12: J1.A20 383.78,284.88 387.05,288.15 522.87,288.15 v1(523.62,287.4) ; C20.1 452.76,964.57 480.31,992.13 v1(543.31,992.13) v1@547.24,992.13 ; v1(649.61,263.78) 712.6,200.79 ; v1(673.23,992.13) 716.54,992.13 744.09,964.57 C19.2
  Component Side w20: C17.1 238.82,1854.13 266.57,1881.89 303.15,1881.89 ; 387.05,288.15 C16.1 ; C10.1 C11.1 562.99,1642.44 ; v1(531.5,1342.52) 425.2,1342.52 303.15,1464.57 303.15,1740.16 ; C9.1 v1(569.61,1717.32) v1@562.99,1710.71 ; v1(598.43,1342.52) 633.86,1307.09 v1(633.86,1228.35) ; 682.05,1674.88 649.61,1642.44 C12.1 562.99,1642.44 ; J1.B7 692.91,85.75 692.91,181.1 712.6,200.79 720.47,208.66 v1(748.03,208.66) ; v1(732.28,1137.8) 803.15,1137.8 862.2,1078.74 956.69,1078.74 ; 797.05,1829.88 797.05,1852.44 C1.1 ; v1(797.05,1894.88) C1.1 ; v1(826.77,208.66) 1444.88,208.66 1570.87,334.65 1570.87,681.1 ; 882.05,1829.88 C2.1 v1(924.61,1892.32) ; R8.1 956.69,1078.74 ; 1051.18,1082.68 1047.24,1078.74 956.69,1078.74 ; R7.1 1570.87,681.1 ; SJ2.2 1452.08,1809.88 C3.2 ; C18.1 1602.32,2269.88 1604.49,2267.72 C8.1 1604.49,2187.32 1547.05,2129.88 ; P1.1 1466.89,1929.88 1514.53,1929.88 ; P1.5 1466.89,2129.88 1547.05,2129.88 ; U3.8@1573.27,1144.88 1573.27,1218.66 1552.05,1239.88 C13.1 v1(1494.61,1292.32) 1503.46,1283.46 v1(1618.11,1283.46) ; v1(1602.36,1976.38) 1602.36,1944.88 1586.61,1929.13 1585.87,1929.88 1514.53,1929.88 ; v1(1602.36,2082.68) 1602.36,2114.17 1586.65,2129.88 1547.05,2129.88 ; v1(1724.41,1279.53) 1724.41,1271.65 1740.16,1255.91 1740.16,913.39 v1(1728.35,901.57) 1673.23,846.46 C14.1 1618.11,807.09 1570.87,759.84 1570.87,681.1 ; v1(1850.39,897.64) 1852.83,895.2 1876.46,895.2 ; J1.C14 1886.77,884.88 1876.46,895.2 ; J1.C8 1870.71,1484.88 1866.14,1480.32 ; 303.15,1740.16 303.15,1881.89 ; 303.15,1740.16 322.83,1720.47 468.5,1720.47 478.27,1710.71 v1@562.99,1710.71 ; 303.15,1881.89 303.15,1968.5 338.58,2003.94 704.72,2003.94 755.91,1952.76 755.91,1896.18 C1.1 ; 562.99,1642.44 v1@562.99,1710.71 ; 1514.53,1929.88 1594.49,1849.92 C3.2 ; C3.2 1594.49,1744.09 1603.3,1735.28 1661.41,1735.28 1662.35,1736.22 1708.66,1736.22 1858.27,1586.61 1858.27,1488.19 1866.14,1480.32 ; 1866.14,1480.32 1866.14,905.51 1876.46,895.2
  Component Side w25: C19.2 1023.62,964.57 1051.18,992.13 1051.18,1082.68 1051.18,1185.57 1135.29,1269.69 1135.83,1269.69 ; C15.1 1082.68,1403.07 1082.68,1314.96 1090.55,1314.96 1135.83,1269.69 ; v1(1173.23,1307.09) 1135.83,1269.69 ; v1(1291.34,1307.09) 1330.71,1307.09 1370.08,1346.46 1440.94,1346.46 ; v1@1307.09,1524.88 1380.63,1524.88 1440.94,1464.57 1440.94,1346.46 ; v1(1494.61,1292.32) 1494.61,1328.23 1476.38,1346.46 1440.94,1346.46
  Bottom Layer w10: v1(1307.05,1619.88) v1(1307.09,1527.56) v1(1307.09,1527.56)
  Bottom Layer w12: v1(523.62,287.4) 625.98,287.4 v1(649.61,263.78) ; v1(543.31,992.13) v1(673.23,992.13) ; v1(1173.23,1307.09) v1(1291.34,1307.09)
  Bottom Layer w20: v1(531.5,1342.52) v1(598.43,1342.52) ; v1(633.86,1228.35) 724.41,1137.8 v1(732.28,1137.8) ; v1(748.03,208.66) v1(826.77,208.66) ; v1(797.05,1894.88) 799.61,1892.32 v1(924.61,1892.32) ; v1(1602.36,1976.38) v1(1602.36,2082.68) ; v1(1618.11,1283.46) 1622.05,1279.53 v1(1724.41,1279.53) ; v1(1728.35,901.57) 1732.28,897.64 v1(1850.39,897.64)
VDD_CPU: P1.6 SJ1.1 U1.37 | length 781.9
  Component Side w6: U1.37@957.05,1753.82 957.05,1824.88 962.05,1829.88
  Component Side w20: 962.05,1829.88 1039.37,1907.2 1039.37,2037.2 1132.05,2129.88 1204.72,2129.88 ; SJ1.1 1208.19,2126.41 1204.72,2129.88 ; P1.6 1362.24,2129.88 1204.72,2129.88
VDD_RTC: P1.2 SJ2.1 U1.19 | length 1131.3
  Component Side w6: v1(877.05,1419.88) 872.05,1419.88 878.31,1426.14 U1.19@878.31,1499.88
  Component Side w20: v1(1192.05,1929.88) 1309.61,1929.88 1362.24,1929.88 P1.2
  Component Side w25: 1309.61,1929.88 1309.61,1890.71 SJ2.1
  Bottom Layer w25: v1(877.05,1419.88) 972.05,1419.88 1027.05,1474.88 1027.05,1764.88 v1(1192.05,1929.88)
pads on no net: J1.A1 J1.A5 J1.A19 J1.B2 J1.B11 J1.B12 J1.B13 J1.B14 J1.B16 J1.B17 J1.B18 J1.B19 J1.B20 J1.C11 J1.C12 J1.C13 J1.C15 J1.MH1 J1.MH2 R1.0 R2.0 R3.0 R4.0 R5.0 R6.0 R7.0 R8.0 R9.0 R10.0 R11.0 U1.2 U1.5 U1.6 U1.7 U1.8 U1.10 U1.11 U1.12 U1.13 U1.14 U1.15 U1.16 U1.27 U1.38 U1.39 U1.42 U1.44 U2.6 U2.9

## Polygon pours and split planes (outlines as drawn)
GND on Bottom Layer "GND" (solid, pour order 0): -98.43,2716.54 -23.62,2641.73 2326.77,2641.73 2326.77,-141.73 2145.67,-322.83 -43.31,-322.83 -43.31,409.45 -177.17,543.31
GND on Component Side "GND" (solid, remove dead copper, pour order 2): -62.99,2716.54 -43.31,2736.22 2263.78,2736.22 2263.78,39.37 2090.55,-133.86 -192.91,-133.86

## Silkscreen, mask and mechanical layers (free items; w line width, h text height)
Top Overlay:
  drawing of 7 lines, arcs and shapes, not listed
  text "ESP32 Target Board" at 515.75,2429.13 h60
  text "For ChipWhisperer / CW308 UFO Board" at 507.69,2272.58 h40
  text "cwdocs.com/esp32" at 216.54,1877.95 h40 r32.14
  text "GPIO1" at 188.98,1562.99 h40
  text "GPIO3" at 188.98,1464.57 h40
  text "GPIO0" at 188.98,1366.14 h40
  text "GPIO4" at 192.91,1267.72 h40
  text "nRST" at 192.91,1169.29 h40
  text "SCK" at 188.98,1066.93 h40
  text "See reverse for RUN conditions." at 1866.14,980.32 h40 r90
  text "SDO" at 192.91,964.57 h40
  text "SDI" at 192.91,866.14 h40
  text "BUF_EN" at 192.91,562.99 h40
  text "GPIO23" at 1669.29,468.5 h40
  text "CS" at 192.91,464.57 h40
  text "GPIO18" at 1677.17,366.14 h40
  text "GPIO5" at 1704.72,271.65 h40
  text "JTAG" at 531.5,204.72 h40
  text "GPIO16" at 1511.81,177.17 h40 r90
Bottom Overlay:
  lines w11.81: 216.54,1228.35 216.54,1224.41 1862.2,1224.41 ; 614.17,1062.99 614.17,1338.58 618.11,1338.58 ; 177.17,767.72 177.17,881.89 1862.2,881.89 1862.2,767.72 177.17,767.72 ; 216.54,1062.99 216.54,1338.58 1862.2,1338.58 1862.2,1062.99 216.54,1062.99 ; 346.46,913.39 1862.2,913.39 1862.2,1023.62 346.46,1023.62 346.46,913.39
  text "NewAE Technology Inc.  / NAE-CW308T-ESP32-02 / RoHS / Pb-Free" at 1629.92,2196.85 h60
  text "GPIO0 (GPIO3 on ChipWhisperer)   Mode /       1 (HIGH)                   RUN /       0 (LOW)                   BOOTLDR" at 1830.71,1003.94 h40
  text "Short TDI to GND to disable boot msgs." at 1834.65,866.14 h40
  text "Set PDIC (BUF_EN) high to enable SPI output" at 1834.65,728.35 h40
  text "cwdocs.com/esp32" at 1385.83,629.92 h80
  text "W" at 1573.66,402.44 h250
  text "p" at 1813.66,382.44 h250
  text "C" at 1813.66,232.44 h250
Mechanical 1:
  lines w10: 15.75,2543.31 2070.75,2543.94 2070.75,3.94 15.75,3.94 15.75,2543.94